# EAGLE board shieldV7 (EAGLE 8.7.1)
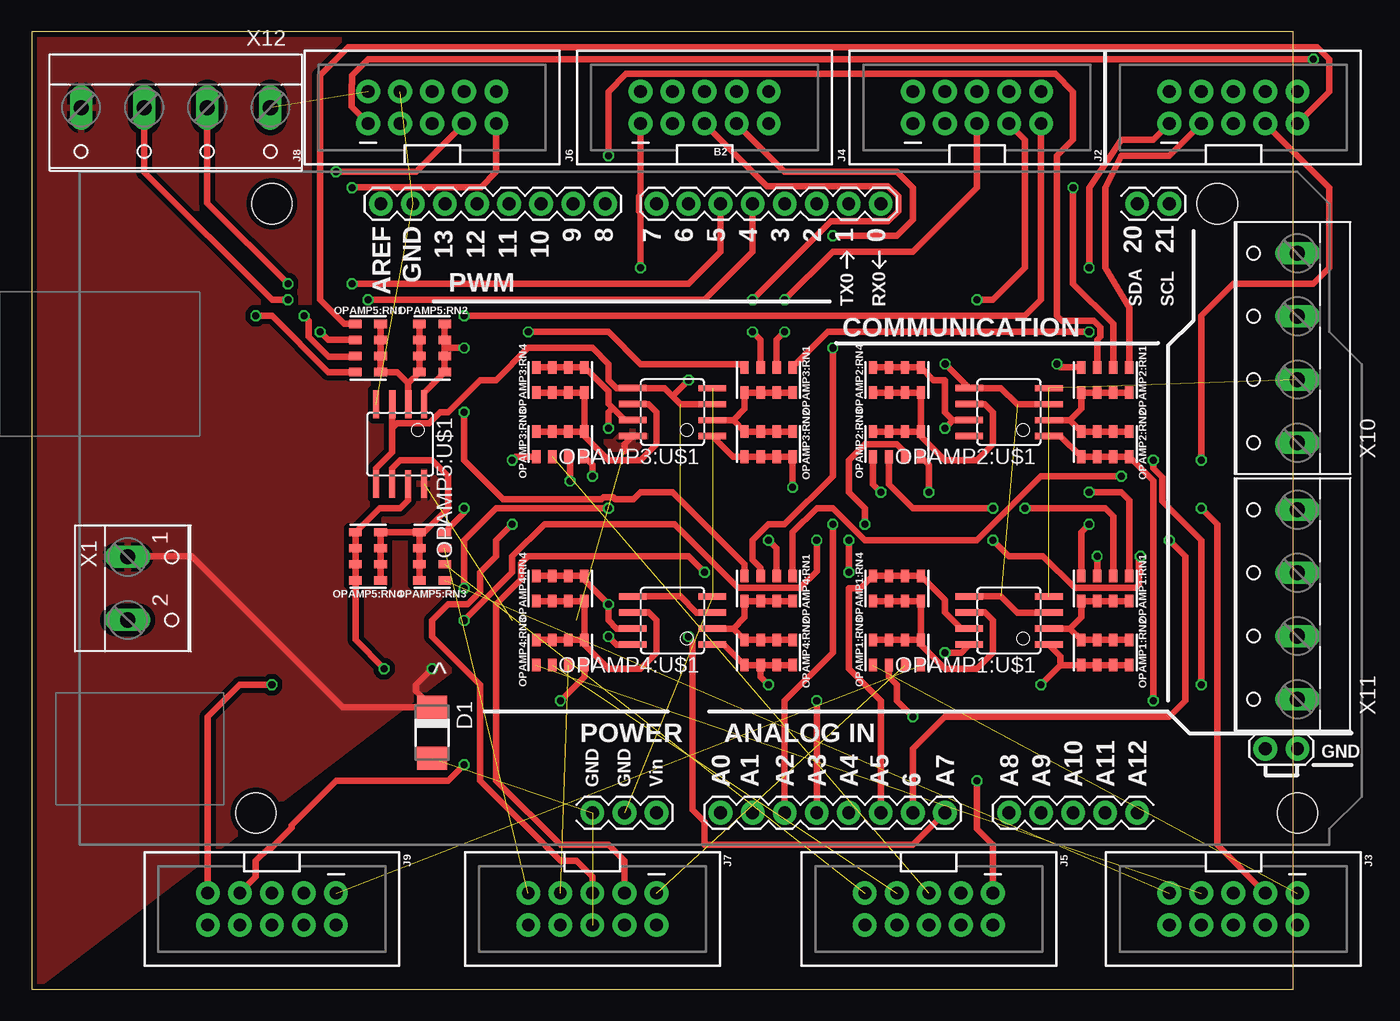
[diagram p0: board, top side]
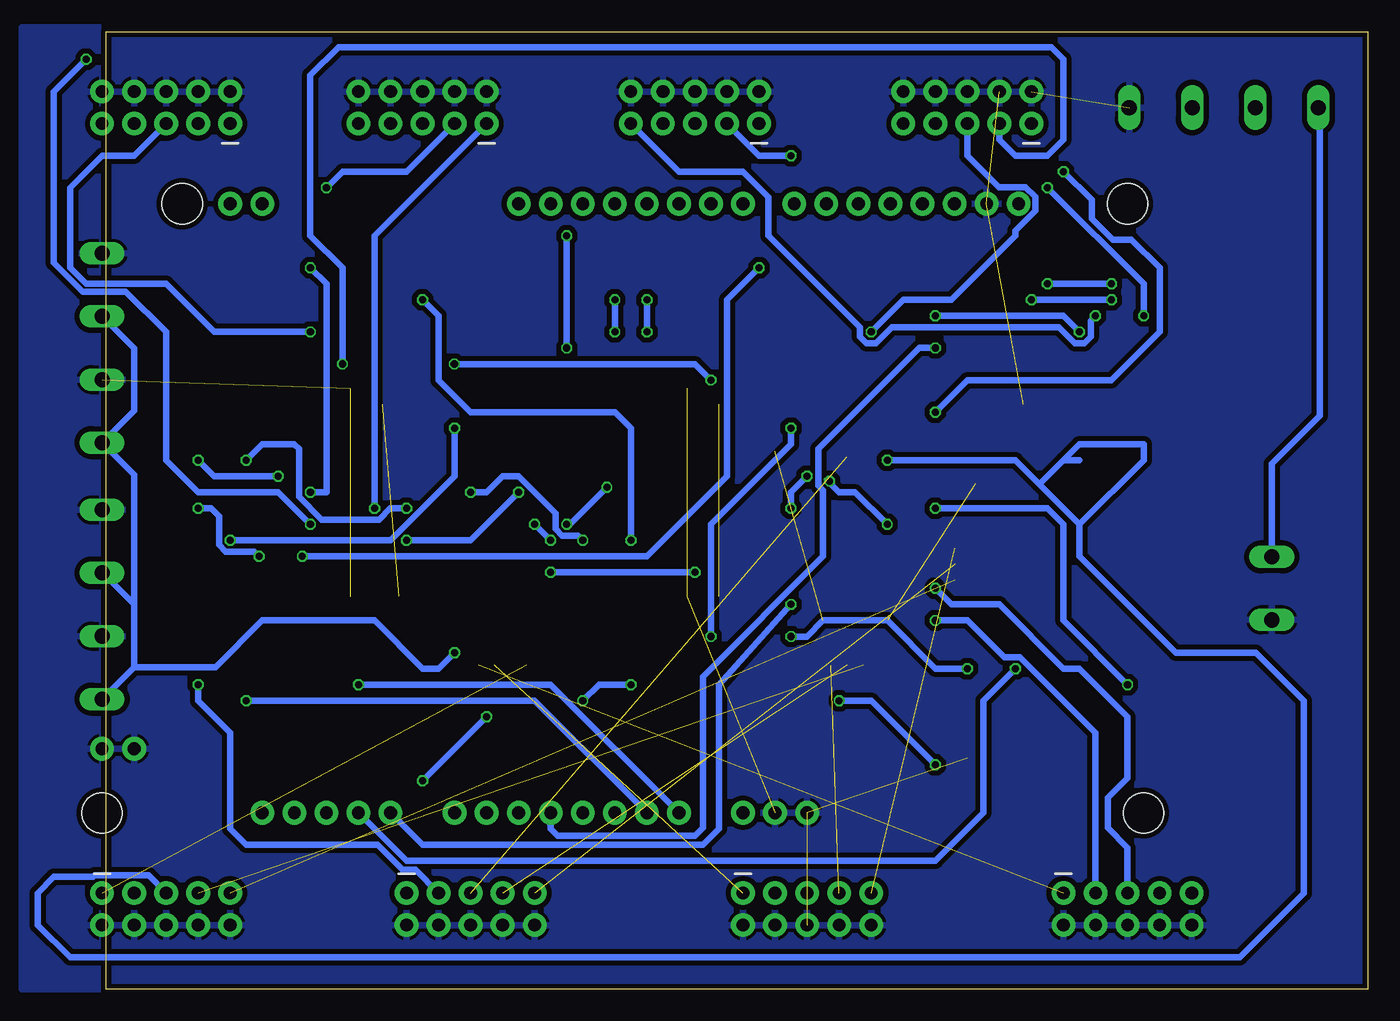
[diagram p1: board, bottom side, seen from below]

Size 100 x 75.87 mm. Coordinates in mm from the lower left corner, seen from the top.
Outline: 0,0 100,0 100,75.87 0,75.87 0,0
Copper layers (1*16): Top 0.035mm / dielectric 1.5mm / Bottom 0.035mm
Design rules "Dirty8TS": minimum track width 5mil, minimum drill 12mil, track to track 8mil, track to pad 8mil, pad to pad 8mil, via to via 8mil, smd to smd 0mil, copper to edge 10mil, drill to drill 10mil, minimum pad ring 10mil, minimum via ring 6mil, stop-mask expansion 2mil, vias tented up to drill 25mil, thermal gap 10mil
Net classes: 0 default: width 0.203 mm, drill 0.381 mm, clearance 0.203 mm

## Footprints (pad centres in the part's own frame; a part is rotated, then mirrored left to right if it is on the bottom)
ARDUINO_MEGA_EDIT = drill 1.016 pad 1.88: 0 13.97,24.13; 1 11.43,24.13; 2 8.89,24.13; 3 6.35,24.13; 4 3.81,24.13; 5 1.27,24.13; 6 -1.27,24.13; 7 -3.81,24.13; 8 -7.874,24.13; 9 -10.414,24.13; 10 -12.954,24.13; 11 -15.494,24.13; 12 -18.034,24.13; 13 -20.574,24.13; 20 34.29,24.13; 21 36.83,24.13; A0 1.27,-24.13; A1 3.81,-24.13; A2 6.35,-24.13; A3 8.89,-24.13; A4 11.43,-24.13; A5 13.97,-24.13; A6 16.51,-24.13; A7 19.05,-24.13; A8 24.13,-24.13; A9 26.67,-24.13; A10 29.21,-24.13; A11 31.75,-24.13; A12 34.29,-24.13; AREF -25.654,24.13; GND@0 -8.89,-24.13; GND@1 -6.35,-24.13; GND@2 44.45,-19.05; GND@3 46.99,-19.05; GND@4 -23.114,24.13; VIN -3.81,-24.13 | hole 3.2: -34.29,24.13; -35.56,-24.13; 40.64,24.13; 46.99,-24.13
DO-214AC = smd 1.8 x 2.4: A 2.025,0; C -2.025,0
2X5-SHROUDED = drill 1.016 pad 1.88: 1 -1.27,5.08; 2 1.27,5.08; 3 -1.27,2.54; 4 1.27,2.54; 5 -1.27,0; 6 1.27,0; 7 -1.27,-2.54; 8 1.27,-2.54; 9 -1.27,-5.08; 10 1.27,-5.08
0805-ARV_EDIT10K = smd 0.65 x 1: 1 -1.905,-1; 2 -0.635,-1; 3 0.635,-1; 4 1.905,-1; 5 1.905,1; 6 0.635,1; 7 -0.635,1; 8 -1.905,1
SOIC8 = smd 0.5 x 2.2: 1 -1.905,-3.154; 2 -0.645,-3.154; 3 0.625,-3.154; 4 1.895,-3.154; 5 1.905,3.154; 6 0.635,3.154; 7 -0.635,3.154; 8 -1.905,3.154
W237-102 = drill 1.194 long: 1 -2.5,-1.27; 2 2.5,-1.27
W237-4 = drill 1.194 long: 1 -7.5,-1.27; 2 -2.5,-1.27; 3 2.5,-1.27; 4 7.5,-1.27

## Placement (x,y rotation side)
B2  ARDUINO_MEGA_R3_EDIT  [ARDUINO_MEGA_EDIT]  53.34,38.1 0 top
D1  [DO-214AC]  31.75,20.32 270 top
J2  AVR_SPI_PROG_5X2_NEWPTH2  [2X5-SHROUDED]  95.25,69.85 90 top
J3  AVR_SPI_PROG_5X2_NEWPTH2  [2X5-SHROUDED]  95.25,6.35 270 top
J4  AVR_SPI_PROG_5X2_NEWPTH2  [2X5-SHROUDED]  74.93,69.85 90 top
J5  AVR_SPI_PROG_5X2_NEWPTH2  [2X5-SHROUDED]  71.12,6.35 270 top
J6  AVR_SPI_PROG_5X2_NEWPTH2  [2X5-SHROUDED]  53.34,69.85 90 top
J7  AVR_SPI_PROG_5X2_NEWPTH2  [2X5-SHROUDED]  44.45,6.35 270 top
J8  AVR_SPI_PROG_5X2_NEWPTH2  [2X5-SHROUDED]  31.75,69.85 90 top
J9  AVR_SPI_PROG_5X2_NEWPTH2  [2X5-SHROUDED]  19.05,6.35 270 top
OPAMP1:RN1  10k  [0805-ARV_EDIT10K]  85.09,31.75 180 top
OPAMP1:RN2  10k  [0805-ARV_EDIT10K]  85.09,26.67 180 top
OPAMP1:RN3  10k  [0805-ARV_EDIT10K]  68.58,26.67 0 top
OPAMP1:RN4  10k  [0805-ARV_EDIT10K]  68.58,31.75 0 top
OPAMP1:U$1  MCP6002SMT  [SOIC8]  77.47,29.21 90 top
OPAMP2:RN1  10k  [0805-ARV_EDIT10K]  85.09,48.26 180 top
OPAMP2:RN2  10k  [0805-ARV_EDIT10K]  85.09,43.18 180 top
OPAMP2:RN3  10k  [0805-ARV_EDIT10K]  68.58,43.18 0 top
OPAMP2:RN4  10k  [0805-ARV_EDIT10K]  68.58,48.26 0 top
OPAMP2:U$1  MCP6002SMT  [SOIC8]  77.47,45.72 90 top
OPAMP3:RN1  10k  [0805-ARV_EDIT10K]  58.42,48.26 180 top
OPAMP3:RN2  10k  [0805-ARV_EDIT10K]  58.42,43.18 180 top
OPAMP3:RN3  10k  [0805-ARV_EDIT10K]  41.91,43.18 0 top
OPAMP3:RN4  10k  [0805-ARV_EDIT10K]  41.91,48.26 0 top
OPAMP3:U$1  MCP6002SMT  [SOIC8]  50.8,45.72 90 top
OPAMP4:RN1  10k  [0805-ARV_EDIT10K]  58.42,31.75 180 top
OPAMP4:RN2  10k  [0805-ARV_EDIT10K]  58.42,26.67 180 top
OPAMP4:RN3  10k  [0805-ARV_EDIT10K]  41.91,26.67 0 top
OPAMP4:RN4  10k  [0805-ARV_EDIT10K]  41.91,31.75 0 top
OPAMP4:U$1  MCP6002SMT  [SOIC8]  50.8,29.21 90 top
OPAMP5:RN1  10k  [0805-ARV_EDIT10K]  26.67,50.8 270 top
OPAMP5:RN2  10k  [0805-ARV_EDIT10K]  31.75,50.8 270 top
OPAMP5:RN3  10k  [0805-ARV_EDIT10K]  31.75,34.29 90 top
OPAMP5:RN4  10k  [0805-ARV_EDIT10K]  26.67,34.29 90 top
OPAMP5:U$1  MCP6002SMT  [SOIC8]  29.21,43.18 180 top
X1  [W237-102]  8.89,31.75 270 top
X10  [W237-4]  99.06,50.8 90 top
X11  [W237-4]  99.06,30.48 90 top
X12  [W237-4]  11.43,68.58 180 top

## Library data of the parts
B2 = SparkFun-Boards
D1 = diode
J2-J9 = SparkFun-Connectors; PROD_ID: CONN-08671; SF_ID: PRT-08506
OPAMP1:RN1-OPAMP1:RN4 OPAMP2:RN1-OPAMP2:RN4 OPAMP3:RN1-OPAMP3:RN4 OPAMP4:RN1-OPAMP4:RN4 OPAMP5:RN1-OPAMP5:RN4 = SparkFun-Resistors
OPAMP1:U$1 OPAMP2:U$1 OPAMP3:U$1 OPAMP4:U$1 OPAMP5:U$1 = adam - ics
X1 = con-wago-500; MPN: 237-102; OC_FARNELL: unknown; OC_NEWARK: 70K9898
X10-X12 = con-wago-500; OC_FARNELL: unknown; OC_NEWARK: unknown

## Nets
+5V: B2.VIN D1.C OPAMP1:U$1.8 OPAMP3:U$1.8 OPAMP4:U$1.8 OPAMP5:U$1.8 X1.1 X10.1 X10.3 X11.1 X11.3 X12.4
A1O: B2.A0 OPAMP1:RN2.5 OPAMP1:RN2.6 OPAMP1:RN2.7 OPAMP1:RN2.8 OPAMP1:U$1.1
A2O: B2.A1 OPAMP2:RN2.5 OPAMP2:RN2.6 OPAMP2:RN2.7 OPAMP2:RN2.8 OPAMP2:U$1.1
A3O: B2.A2 OPAMP3:RN2.5 OPAMP3:RN2.6 OPAMP3:RN2.7 OPAMP3:RN2.8 OPAMP3:U$1.1
A4O: B2.A3 OPAMP4:RN2.5 OPAMP4:RN2.6 OPAMP4:RN2.7 OPAMP4:RN2.8 OPAMP4:U$1.1
A5O: B2.A4 OPAMP5:RN2.5 OPAMP5:RN2.6 OPAMP5:RN2.7 OPAMP5:RN2.8 OPAMP5:U$1.1
A6O: B2.A5 OPAMP1:RN4.5 OPAMP1:RN4.6 OPAMP1:RN4.7 OPAMP1:RN4.8 OPAMP1:U$1.7
A7O: B2.A6 OPAMP2:RN4.5 OPAMP2:RN4.6 OPAMP2:RN4.7 OPAMP2:RN4.8 OPAMP2:U$1.7
A8O: B2.A7 OPAMP3:RN4.5 OPAMP3:RN4.6 OPAMP3:RN4.7 OPAMP3:RN4.8 OPAMP3:U$1.7
A9O: B2.A8 OPAMP4:RN4.5 OPAMP4:RN4.6 OPAMP4:RN4.7 OPAMP4:RN4.8 OPAMP4:U$1.7
A10O: B2.A9 OPAMP5:RN4.5 OPAMP5:RN4.6 OPAMP5:RN4.7 OPAMP5:RN4.8 OPAMP5:U$1.7
CI: B2.4 X12.3
DI: B2.5 X12.2
GND: B2.GND@0 B2.GND@1 B2.GND@2 B2.GND@3 B2.GND@4 D1.A J2.2 J2.4 J2.6 J2.8 J2.10 J3.2 J3.4 J3.6 J3.8 J3.10 J4.2 J4.4 J4.6 J4.8 J4.10 J5.2 J5.4 J5.6 J5.8 J5.10 J6.2 J6.4 J6.6 J6.8 J6.10 J7.2 J7.4 J7.6 J7.8 J7.10 J8.2 J8.4 J8.6 J8.8 J8.10 J9.2 J9.4 J9.6 J9.8 J9.10 OPAMP1:U$1.4 OPAMP2:U$1.4 OPAMP3:U$1.4 OPAMP4:U$1.4 OPAMP5:U$1.4 X1.2 X10.2 X10.4 X11.2 X11.4 X12.1
OPAMP1:N$1: OPAMP1:RN3.5 OPAMP1:RN3.6 OPAMP1:RN3.7 OPAMP1:RN3.8 OPAMP1:RN4.1 OPAMP1:RN4.2 OPAMP1:RN4.3 OPAMP1:RN4.4 OPAMP1:U$1.6
OPAMP1:N$2: OPAMP1:RN1.5 OPAMP1:RN1.6 OPAMP1:RN1.7 OPAMP1:RN1.8 OPAMP1:RN2.1 OPAMP1:RN2.2 OPAMP1:RN2.3 OPAMP1:RN2.4 OPAMP1:U$1.2
OPAMP2:N$1: OPAMP2:RN3.5 OPAMP2:RN3.6 OPAMP2:RN3.7 OPAMP2:RN3.8 OPAMP2:RN4.1 OPAMP2:RN4.2 OPAMP2:RN4.3 OPAMP2:RN4.4 OPAMP2:U$1.6
OPAMP2:N$2: OPAMP2:RN1.5 OPAMP2:RN1.6 OPAMP2:RN1.7 OPAMP2:RN1.8 OPAMP2:RN2.1 OPAMP2:RN2.2 OPAMP2:RN2.3 OPAMP2:RN2.4 OPAMP2:U$1.2
OPAMP3:N$1: OPAMP3:RN3.5 OPAMP3:RN3.6 OPAMP3:RN3.7 OPAMP3:RN3.8 OPAMP3:RN4.1 OPAMP3:RN4.2 OPAMP3:RN4.3 OPAMP3:RN4.4 OPAMP3:U$1.6
OPAMP3:N$2: OPAMP3:RN1.5 OPAMP3:RN1.6 OPAMP3:RN1.7 OPAMP3:RN1.8 OPAMP3:RN2.1 OPAMP3:RN2.2 OPAMP3:RN2.3 OPAMP3:RN2.4 OPAMP3:U$1.2
OPAMP4:N$1: OPAMP4:RN3.5 OPAMP4:RN3.6 OPAMP4:RN3.7 OPAMP4:RN3.8 OPAMP4:RN4.1 OPAMP4:RN4.2 OPAMP4:RN4.3 OPAMP4:RN4.4 OPAMP4:U$1.6
OPAMP4:N$2: OPAMP4:RN1.5 OPAMP4:RN1.6 OPAMP4:RN1.7 OPAMP4:RN1.8 OPAMP4:RN2.1 OPAMP4:RN2.2 OPAMP4:RN2.3 OPAMP4:RN2.4 OPAMP4:U$1.2
OPAMP5:N$1: OPAMP5:RN3.5 OPAMP5:RN3.6 OPAMP5:RN3.7 OPAMP5:RN3.8 OPAMP5:RN4.1 OPAMP5:RN4.2 OPAMP5:RN4.3 OPAMP5:RN4.4 OPAMP5:U$1.6
OPAMP5:N$2: OPAMP5:RN1.5 OPAMP5:RN1.6 OPAMP5:RN1.7 OPAMP5:RN1.8 OPAMP5:RN2.1 OPAMP5:RN2.2 OPAMP5:RN2.3 OPAMP5:RN2.4 OPAMP5:U$1.2
S1A: J2.1 OPAMP1:RN1.1
S1B: J3.1 OPAMP1:RN3.1
S2A: J2.3 OPAMP2:RN1.1
S2B: J3.3 OPAMP2:RN3.1
S3A: J2.5 OPAMP3:RN1.1
S3B: J3.5 OPAMP3:RN3.1
S4A: J2.7 OPAMP4:RN1.1
S4B: J3.7 OPAMP4:RN3.1
S5A: J2.9 OPAMP5:RN1.1
S5B: J3.9 OPAMP5:RN3.1
S6A: J4.1 OPAMP1:RN1.2
S6B: J5.1 OPAMP1:RN3.2
S7A: J4.3 OPAMP2:RN1.2
S7B: J5.3 OPAMP2:RN3.2
S8A: J4.5 OPAMP3:RN1.2
S8B: J5.5 OPAMP3:RN3.2
S9A: J4.7 OPAMP4:RN1.2
S9B: J5.7 OPAMP4:RN3.2
S10A: J4.9 OPAMP5:RN1.2
S10B: J5.9 OPAMP5:RN3.2
S11A: J6.1 OPAMP1:RN1.3
S11B: J7.1 OPAMP1:RN3.3
S12A: J6.3 OPAMP2:RN1.3
S12B: J7.3 OPAMP2:RN3.3
S13A: J6.5 OPAMP3:RN1.3
S13B: J7.5 OPAMP3:RN3.3
S14A: J6.7 OPAMP4:RN1.3
S14B: J7.7 OPAMP4:RN3.3
S15A: J6.9 OPAMP5:RN1.3
S15B: J7.9 OPAMP5:RN3.3
S16A: J8.1 OPAMP1:RN1.4
S16B: J9.1 OPAMP1:RN3.4
S17A: J8.3 OPAMP2:RN1.4
S17B: J9.3 OPAMP2:RN3.4
S18A: J8.5 OPAMP3:RN1.4
S18B: J9.5 OPAMP3:RN3.4
S19A: J8.7 OPAMP4:RN1.4
S19B: J9.7 OPAMP4:RN3.4
S20A: J8.9 OPAMP5:RN1.4
S20B: J9.9 OPAMP5:RN3.4
VCC: OPAMP2:U$1.8
VREF: OPAMP1:U$1.3 OPAMP1:U$1.5 OPAMP2:U$1.3 OPAMP2:U$1.5 OPAMP3:U$1.3 OPAMP3:U$1.5 OPAMP4:U$1.3 OPAMP4:U$1.5 OPAMP5:U$1.3 OPAMP5:U$1.5

## Tracks (layer width: path | path; a pad name or v marks a point on that pad's centre or on a via)
+5V  (via drill 0.56)  (2 unrouted)
  Top 0.508: v72.39,26.67 73.68,26.67 OPAMP1:U$1.8 | OPAMP4:U$1.8 46.35,27.3 v45.72,27.94 | v31.75,25.4 30.48,24.13 30.48,23.61 D1.C 24.64,22.34 12.7,34.29 7.66,34.29 X1.1 | OPAMP3:U$1.8 46.99,43.16 46.99,42.62
  Bottom 0.508: X10.3 97.79,50.76 97.79,45.84 X10.1 97.79,40.76 97.79,30.48 | X11.1 97.79,25.52 | 97.79,25.52 97.79,30.48 | 97.79,30.48 100.29,32.98 X11.3 | X12.4 3.81,69.73 3.81,45.45 7.62,41.64 X1.1 | 97.79,25.52 91.32,25.52 87.63,29.21 78.74,29.21 74.93,25.4 73.66,25.4 v72.39,26.67 | v45.72,27.94 44.45,27.94 43.18,29.21 38.1,29.21 34.29,25.4 v31.75,25.4
  pour Top (isolate 0.406): 0,76.2 100,76.2 0,0 0,0
A1O  (via drill 0.56)
  Top 0.508: v80.01,24.13 81.55,25.67 | 81.55,25.67 OPAMP1:RN2.5 OPAMP1:RN2.6 OPAMP1:RN2.7 OPAMP1:RN2.8 | OPAMP1:U$1.1 81.55,26.38 81.55,25.67
  Bottom 0.508: B2.A0 64.77,24.13 v80.01,24.13
A2O  (via drill 0.56)
  Top 0.508: OPAMP2:U$1.1 81.55,43.81 OPAMP2:RN2.5 OPAMP2:RN2.6 OPAMP2:RN2.7 OPAMP2:RN2.8 88.9,40.27 v88.9,22.86
  Bottom 0.508: B2.A1 66.04,22.86 v88.9,22.86
A3O  (via drill 0.56)
  Top 0.508: OPAMP3:U$1.1 55.59,42.18 OPAMP3:RN2.5 OPAMP3:RN2.6 OPAMP3:RN2.7 OPAMP3:RN2.8 v60.33,39.75 | v63.5,36.83 63.5,26.67 59.69,22.86 B2.A2
  Bottom 0.508: v60.33,39.75 63.25,36.83 v63.5,36.83
A4O  (via drill 0.56)
  Top 0.508: OPAMP4:RN2.6 OPAMP4:RN2.5 54.88,27.3 OPAMP4:U$1.1 | OPAMP4:RN2.6 OPAMP4:RN2.7 OPAMP4:RN2.8 | B2.A3 v62.23,22.86 | v58.42,24.13 57.78,24.77 OPAMP4:RN2.6
  Bottom 0.508: v62.23,22.86 60.96,24.13 v58.42,24.13
A5O  (via drill 0.56)
  Top 0.508: 32.75,50.8 OPAMP5:RN2.6 OPAMP5:RN2.5 31.11,47.26 OPAMP5:U$1.1 | 32.75,50.8 OPAMP5:RN2.7 OPAMP5:RN2.8 | 32.75,50.8 v34.29,50.8
  Bottom 0.508: B2.A4 64.77,12.7 64.21,12.14 53.34,12.14 52.7,12.78 52.7,24.77 43.18,34.29 43.18,39.51 43.56,39.89 43.56,42.8 35.56,50.8 v34.29,50.8
A6O
  Top 0.508: OPAMP1:U$1.7 73.7,28.57 72.39,29.88 72.39,30.84 OPAMP1:RN4.5 OPAMP1:RN4.6 OPAMP1:RN4.7 OPAMP1:RN4.8 65.67,31.75 64.77,31.75 64.77,25.4 67.31,22.86 B2.A5
A7O  (via drill 0.56)
  Top 0.508: OPAMP2:RN4.8 OPAMP2:RN4.7 OPAMP2:RN4.6 OPAMP2:RN4.5 71.48,48.26 72.39,48.26 72.39,45.72 73.03,45.09 | OPAMP2:U$1.7 73.03,45.09 | B2.A6 69.85,19.05 72.39,21.59 90.17,21.59 91.44,22.86 91.44,34.29 v90.17,35.56 | v72.39,44.45 73.03,45.09
  Bottom 0.508: v90.17,35.56 77.47,35.56 72.39,40.64 v72.39,44.45
A8O  (via drill 0.56)
  Top 0.508: OPAMP3:RN4.8 OPAMP3:RN4.7 OPAMP3:RN4.6 OPAMP3:RN4.5 45.72,47.35 45.72,46.39 46.06,46.06 | 46.06,46.06 47.03,45.09 OPAMP3:U$1.7 | B2.A7 69.85,11.43 53.34,11.43 53.34,13.26 52.4,14.21 52.4,27.61 v52.07,27.94 | v45.72,44.45 45.72,45.72 46.06,46.06
  Bottom 0.508: v52.07,27.94 52.07,36.83 45.72,43.18 v45.72,44.45
A9O  (via drill 0.56)
  Top 0.508: OPAMP4:U$1.7 46.35,28.57 45.72,29.21 v45.72,30.48 43.81,32.38 OPAMP4:RN4.5 OPAMP4:RN4.6 OPAMP4:RN4.7 OPAMP4:RN4.8
  Bottom 0.508: B2.A8 74.93,11.43 52.7,11.43 51.44,12.7 51.44,24.13 v45.72,30.48
A10O  (via drill 0.56)
  Top 0.508: v27.94,25.4 25.67,27.67 OPAMP5:RN4.8 OPAMP5:RN4.7 OPAMP5:RN4.6 OPAMP5:RN4.5 27.57,38.1 29.21,38.1 29.84,38.73 OPAMP5:U$1.7
  Bottom 0.508: B2.A9 76.2,10.16 34.29,10.16 30.48,13.97 30.48,22.86 v27.94,25.4
CI  (via drill 0.56)
  Top 0.508: X12.3 8.93,64.73 19.05,54.61 v20.32,54.61 | v26.67,54.61 53.34,54.61 57.15,58.42 B2.4
  Bottom 0.508: v20.32,54.61 v26.67,54.61
DI  (via drill 0.56)
  Top 0.508: X12.2 13.93,62.27 v20.32,55.88 | v25.4,55.88 52.07,55.88 54.61,58.42 B2.5
  Bottom 0.508: v20.32,55.88 v25.4,55.88
GND  (9 unrouted)
  pour Bottom (isolate 0.406): 0,76.2 106.68,76.2 106.68,0 0,0
OPAMP1:N$1
  Top 0.508: OPAMP1:RN3.8 OPAMP1:RN3.7 OPAMP1:RN3.6 OPAMP1:RN3.5 | OPAMP1:RN4.1 OPAMP1:RN4.2 OPAMP1:RN4.3 OPAMP1:RN4.4 OPAMP1:RN3.5 | OPAMP1:U$1.6 75.56,29.84 76.2,29.21 76.2,26.67 74.93,25.4 72.39,25.4 70.48,27.3 OPAMP1:RN3.5
OPAMP1:N$2
  Top 0.508: OPAMP1:RN1.8 OPAMP1:RN1.7 OPAMP1:RN1.6 OPAMP1:RN1.5 83.19,29.46 82.29,28.57 | OPAMP1:RN2.1 OPAMP1:RN2.2 OPAMP1:RN2.3 OPAMP1:RN2.4 82.29,28.57 | OPAMP1:U$1.2 82.29,28.57
OPAMP2:N$1
  Top 0.508: OPAMP2:RN3.8 OPAMP2:RN3.7 OPAMP2:RN3.6 OPAMP2:RN3.5 | OPAMP2:RN4.1 OPAMP2:RN4.2 OPAMP2:RN4.3 OPAMP2:RN4.4 OPAMP2:RN3.5 | OPAMP2:U$1.6 75.56,46.35 76.2,45.72 76.2,43.18 74.93,41.91 72.39,41.91 70.48,43.81 OPAMP2:RN3.5
OPAMP2:N$2
  Top 0.508: OPAMP2:RN1.8 OPAMP2:RN1.7 OPAMP2:RN1.6 OPAMP2:RN1.5 83.19,45.97 82.29,45.08 | OPAMP2:RN2.1 OPAMP2:RN2.2 OPAMP2:RN2.3 OPAMP2:RN2.4 82.29,45.08 | OPAMP2:U$1.2 82.29,45.08
OPAMP3:N$1
  Top 0.508: OPAMP3:RN3.8 OPAMP3:RN3.7 OPAMP3:RN3.6 OPAMP3:RN3.5 | OPAMP3:RN4.1 OPAMP3:RN4.2 OPAMP3:RN4.3 OPAMP3:RN4.4 OPAMP3:RN3.5 | OPAMP3:U$1.6 48.9,46.35 49.53,45.72 49.53,43.18 48.26,41.91 45.72,41.91 43.81,43.81 OPAMP3:RN3.5
OPAMP3:N$2
  Top 0.508: OPAMP3:RN1.8 OPAMP3:RN1.7 OPAMP3:RN1.6 OPAMP3:RN1.5 56.52,45.97 55.62,45.08 | OPAMP3:RN2.1 OPAMP3:RN2.2 OPAMP3:RN2.3 OPAMP3:RN2.4 55.62,45.08 | OPAMP3:U$1.2 55.62,45.08
OPAMP4:N$1
  Top 0.508: OPAMP4:RN3.8 OPAMP4:RN3.7 OPAMP4:RN3.6 OPAMP4:RN3.5 | OPAMP4:RN4.1 OPAMP4:RN4.2 OPAMP4:RN4.3 OPAMP4:RN4.4 OPAMP4:RN3.5 | OPAMP4:U$1.6 48.9,29.84 49.53,29.21 49.53,26.67 48.26,25.4 45.72,25.4 43.81,27.3 OPAMP4:RN3.5
OPAMP4:N$2
  Top 0.508: OPAMP4:RN1.8 OPAMP4:RN1.7 OPAMP4:RN1.6 OPAMP4:RN1.5 56.52,29.46 55.62,28.57 | OPAMP4:RN2.1 OPAMP4:RN2.2 OPAMP4:RN2.3 OPAMP4:RN2.4 55.62,28.57 | OPAMP4:U$1.2 55.62,28.57
OPAMP5:N$1
  Top 0.508: OPAMP5:RN3.8 OPAMP5:RN3.7 OPAMP5:RN3.6 OPAMP5:RN3.5 | OPAMP5:RN4.1 OPAMP5:RN4.2 OPAMP5:RN4.3 OPAMP5:RN4.4 OPAMP5:RN3.5 | OPAMP5:U$1.6 28.57,41.27 29.21,41.91 31.75,41.91 33.02,40.64 33.02,38.1 31.11,36.2 OPAMP5:RN3.5
OPAMP5:N$2
  Top 0.508: OPAMP5:RN1.8 OPAMP5:RN1.7 OPAMP5:RN1.6 OPAMP5:RN1.5 28.96,48.9 29.86,48 | OPAMP5:RN2.1 OPAMP5:RN2.2 OPAMP5:RN2.3 OPAMP5:RN2.4 29.86,48 | OPAMP5:U$1.2 29.86,48
S1A  (via drill 0.56)
  Top 0.508: J2.1 88.9,67.31 86.36,67.31 83.82,63.5 v83.82,57.15 | OPAMP1:RN1.1 87,38.73 86.36,39.37 v83.82,39.37
  Bottom 0.508: v83.82,57.15 82.55,55.88 82.55,39.37 v83.82,39.37
S1B  (1 unrouted)
S2A
  Top 0.508: OPAMP2:RN1.1 87,53.98 85.09,57.15 85.09,63.5 86.36,66.04 90.17,66.04 J2.3
S2B  (via drill 0.56)
  Top 0.508: J3.3 93.98,11.43 93.98,36.83 v92.71,38.1 | v76.2,35.56 77.47,34.29 80.17,34.29 82.67,31.79 87.51,31.79 87.78,32.06 87.78,34.18 v87.88,34.29 | v67.31,39.37 66.67,40.01 OPAMP2:RN3.1
  Bottom 0.508: v92.71,38.1 91.69,38.1 91.06,37.47 91.06,35.19 90.54,34.67 88.27,34.67 v87.88,34.29 | v76.2,35.56 71.12,35.56 v67.31,39.37
S3A  (via drill 0.56)
  Top 0.508: OPAMP3:RN1.1 63.13,52.07 v83.82,52.07
  Bottom 0.508: J2.5 97.79,66.04 100.33,66.04 102.87,63.5 102.87,57.15 101.6,55.88 95.25,55.88 91.44,52.07 v83.82,52.07
S3B  (via drill 0.56)
  Top 0.508: OPAMP3:RN3.1 38.37,42.18 v38.1,41.91
  Bottom 0.508: J3.5 96.65,9.02 100.91,9.02 101.04,8.89 104.14,8.89 105.41,7.62 105.41,5.08 102.87,2.54 10.16,2.54 5.08,7.62 5.08,22.86 8.89,26.67 15.24,26.67 22.86,34.29 22.86,36.83 | 22.86,36.83 17.78,41.91 17.78,43.18 22.86,43.18 24.13,41.91 | 24.13,41.91 22.86,41.91 | v38.1,41.91 27.94,41.91 26.04,40.01 | 26.04,40.01 22.86,36.83 | 24.13,41.91 26.04,40.01
S4A  (via drill 0.56)
  Top 0.508: J2.7 102.87,63.5 102.87,57.15 101.6,55.88 95.25,55.88 92.71,53.34 v92.71,41.91 | OPAMP4:RN1.1 60.33,36.2 62.23,38.1 63.5,38.1 66.04,35.56 74.93,35.56 80.01,40.64 v86.36,40.64
  Bottom 0.508: v92.71,41.91 91.44,40.64 v86.36,40.64
S4B  (1 unrouted)
S5A
  Top 0.508: J2.9 102.87,71.12 102.87,73.66 101.91,74.62 25.09,74.62 22.86,72.39 22.86,54.61 24.77,52.7 OPAMP5:RN1.1
S5B  (1 unrouted)
S6A  (via drill 0.56)
  Top 0.508: OPAMP1:RN1.2 85.72,37.47 85.09,38.1 v78.74,38.1
  Bottom 0.508: v78.74,38.1 78.74,59.69 J4.1
S6B  (via drill 0.56)
  Top 0.508: J5.1 76.2,11.43 74.93,12.7 v74.93,16.51 | OPAMP1:RN3.2 67.94,24.77 68.58,24.13 68.58,22.86 v69.85,21.59
  Bottom 0.508: v74.93,16.51 v69.85,21.59
S7A  (via drill 0.56)
  Top 0.508: OPAMP2:RN1.2 85.72,52.7 82.55,55.88 v82.55,63.5
  Bottom 0.508: v82.55,63.5 81.28,64.77 76.2,64.77 J4.3
S7B  (via drill 0.56)
  Top 0.508: v92.71,24.13 92.71,35.56 89.61,38.66 89.61,40.57 88.9,41.28 v88.9,41.91 | v76.2,38.1 69.85,38.1 67.94,40.01 OPAMP2:RN3.2
  Bottom 0.508: J5.3 75.49,9.45 76.5,9.45 78.48,11.43 88.9,11.43 90.17,12.7 90.17,20.32 92.71,22.86 v92.71,24.13 | v76.2,38.1 77.48,38.1 78.37,37.21 82.92,37.21 84.71,39 84.71,42.8 85.09,43.18 87.63,43.18 v88.9,41.91
S8A  (via drill 0.56)
  Top 0.508: v59.69,54.61 63.5,58.42 69.85,58.42 74.93,63.5 J4.5 | v59.69,52.07 59.05,51.44 OPAMP3:RN1.2
  Bottom 0.508: v59.69,54.61 v59.69,52.07
S8B  (1 unrouted)
S9A  (via drill 0.56)
  Top 0.508: J4.7 78.74,67.31 78.74,57.15 76.2,54.61 v74.93,54.61 | v58.42,35.56 59.05,34.92 OPAMP4:RN1.2
  Bottom 0.508: v74.93,54.61 73.66,53.34 73.66,48.26 71.12,45.72 59.69,45.72 58.42,44.45 v58.42,35.56
S9B  (1 unrouted)
S10A  (via drill 0.56)
  Top 0.508: J4.9 80.01,54.61 78.74,53.34 v34.29,53.34 | OPAMP5:RN1.2 23.5,51.44 v22.86,52.07
  Bottom 0.508: v34.29,53.34 24.13,53.34 v22.86,52.07
S10B  (1 unrouted)
S11A  (via drill 0.56)
  Top 0.508: J6.1 48.26,62.94 48.13,62.81 48.13,61.65 48.26,61.52 v48.26,57.15 | v84.45,34.29 OPAMP1:RN1.3
  Bottom 0.508: v48.26,57.15 50.8,54.61 50.8,40.64 57.15,34.29 v84.45,34.29
S11B  (1 unrouted)
S12A  (via drill 0.56)
  Top 0.508: OPAMP2:RN1.3 84.45,51.45 84.71,51.7 84.71,52.44 84.19,52.96 81.66,52.96 81.28,53.34 81.28,66.04 82.55,67.31 82.55,71.12 81.15,72.52 47.12,72.52 45.72,71.12 v45.72,66.04
  Bottom 0.508: v45.72,66.04 48.26,66.04 J6.3
S12B  (via drill 0.56)
  Top 0.508: J7.3 46.99,10.16 45.72,11.43 41.91,11.43 36.83,16.51 36.83,30.48 38.81,32.46 38.81,33.73 39.37,34.29 52.07,34.29 v53.34,33.02 | OPAMP2:RN3.3 69.22,42.55 68.58,43.18 66.04,43.18 64.77,41.91 64.77,39.37 66.04,38.1 v66.04,36.83 | v64.77,35.56 v64.77,33.02
  Bottom 0.508: v53.34,33.02 v64.77,33.02 | v66.04,36.83 v64.77,35.56
S13A  (via drill 0.56)
  Top 0.508: OPAMP3:RN1.3 57.78,51.44 v57.15,52.07 | v57.15,54.61 63.37,60.83 67.89,60.83 68.71,61.65 68.71,62.81 67.89,63.63 58.29,63.63 J6.5
  Bottom 0.508: v57.15,52.07 v57.15,54.61
S13B  (via drill 0.56)
  Top 0.508: J7.5 44.45,8.89 43.18,10.16 41.91,10.16 35.56,16.51 35.56,24.13 31.75,27.94 31.75,29.21 33.02,30.48 34.55,30.48 35.56,31.49 35.56,33.02 36.83,34.29 36.83,35.56 v38.1,36.83 | v42.67,40.26 42.67,42.05 OPAMP3:RN3.3
  Bottom 0.508: v38.1,36.83 40.64,39.37 41.91,39.37 42.55,40.01 42.55,40.13 v42.67,40.26
S14A  (via drill 0.56)
  Top 0.508: J6.7 59.69,64.77 68.58,64.77 69.85,63.5 69.85,60.96 68.58,59.69 v63.5,59.69 | OPAMP4:RN1.3 57.78,33.4 57.15,34.04 57.15,35.56 58.42,36.83 59.69,36.83 63.5,40.64 v63.5,50.8
  Bottom 0.508: v63.5,59.69 v63.5,50.8
S14B  (1 unrouted)
S15A  (via drill 0.56)
  Top 0.508: OPAMP5:RN1.3 25.28,50.16 25.23,50.11 23.56,50.11 21.97,51.7 21.97,52.96 v21.59,53.34
  Bottom 0.508: J6.9 54.61,64.77 49.53,64.77 47.5,62.74 47.5,59.69 40.26,52.45 40.26,51.7 39.74,51.18 39,51.18 37.73,52.45 24.5,52.45 23.23,51.18 22.49,51.18 21.97,51.7 21.97,52.96 v21.59,53.34
S15B  (1 unrouted)
S16A  (via drill 0.56)
  Top 0.508: J8.1 25.35,69.9 25.35,71.67 25.4,71.72 25.4,72.39 26.67,73.66 v101.6,73.66 | v83.82,36.83 83.19,36.2 OPAMP1:RN1.4
  Bottom 0.508: v101.6,73.66 104.14,71.12 104.14,57.56 101.85,55.27 98.45,55.27 95.25,52.07 95.25,41.91 92.71,39.37 86.36,39.37 v83.82,36.83
S16B  (1 unrouted)
S17A  (via drill 0.56)
  Top 0.508: v81.28,49.53 81.55,49.26 OPAMP2:RN1.4
  Bottom 0.508: J8.3 29.21,67.31 27.94,66.04 25.4,66.04 24.13,67.31 24.13,73.66 25.09,74.62 81.58,74.62 83.82,72.39 83.82,59.69 81.28,57.15 v81.28,49.53
S17B  (via drill 0.56)
  Top 0.508: v34.29,29.21 38.1,33.02 38.1,34.29 40.64,36.83 50.96,36.83 56,31.79 60.92,31.79 | 60.92,31.79 60.96,31.75 | 60.92,31.79 62.23,33.11 v62.23,35.56 | v71.12,39.37 71.12,41.55 OPAMP2:RN3.4
  Bottom 0.508: J9.3 21.59,20.31 27.57,26.29 28.83,26.29 31.75,29.21 v34.29,29.21 | v62.23,35.56 62.61,35.94 63.87,35.94 64.39,36.46 64.39,37.72 67.31,40.64 68.58,40.64 69.85,39.37 v71.12,39.37
S18A  (via drill 0.56)
  Top 0.508: OPAMP3:RN1.4 56.24,49.53 48.26,49.53 45.72,52.07 v39.37,52.07
  Bottom 0.508: J8.5 31.75,66.04 29.26,63.55 27.14,63.55 26.36,62.78 26.36,61.68 27.94,60.11 27.94,59.69 33.02,54.61 36.83,54.61 v39.37,52.07
S18B  (via drill 0.56)
  Top 0.508: v34.29,31.75 34.29,35.56 36.83,38.1 v45.72,38.1 | v44.45,40.64 44.45,41.55 OPAMP3:RN3.4
  Bottom 0.508: J9.5 19.05,11.22 20.62,12.79 20.62,15.15 19.05,16.72 19.05,21.59 22.86,25.4 24.13,25.4 29.21,30.48 33.02,30.48 v34.29,31.75 | v45.72,38.1 45.72,39.37 v44.45,40.64
S19A  (via drill 0.56)
  Top 0.508: J8.7 30.48,64.77 v24.13,64.77 | OPAMP4:RN1.4 56.52,33.66 50.8,39.37 48.26,39.37 47.7,38.81 46.27,38.81 46.09,38.99 45.35,38.99 45.17,38.81 37.39,38.81 34.29,41.91 v34.29,45.72
  Bottom 0.508: v24.13,64.77 21.89,62.53 21.89,61.05 20.23,59.38 18.75,59.38 16.51,57.15 16.51,52.07 20.32,48.26 31.75,48.26 v34.29,45.72
S19B  (via drill 0.56)
  Top 0.508: J9.7 17.78,8.89 17.78,10.16 18.75,11.12 18.96,11.12 20.62,12.79 20.62,13.01 24.13,16.51 33.02,16.51 v34.29,17.78 | v41.91,22.86 43.81,24.77 OPAMP4:RN3.4
  Bottom 0.508: v34.29,17.78 39.37,22.86 v41.91,22.86
S20A  (via drill 0.56)
  Top 0.508: J8.9 36.83,64.77 35.61,63.55 25.45,63.55 v25.4,63.5 | v17.78,53.34 19.05,53.34 23.5,48.9 OPAMP5:RN1.4
  Bottom 0.508: v25.4,63.5 17.78,55.88 v17.78,53.34
S20B  (via drill 0.56)
  Top 0.508: J9.9 13.97,21.59 16.51,24.13 v19.05,24.13 | v34.29,38.1 34.29,37.73 OPAMP5:RN3.4
  Bottom 0.508: v19.05,24.13 24.13,29.21 24.13,36.83 25.4,38.1 v34.29,38.1
VREF  (via drill 0.56)  (2 unrouted)
  Top 0.508: OPAMP3:U$1.3 51.45,46.34 50.8,46.99 | 50.8,46.99 50.16,47.62 OPAMP3:U$1.5 46.35,47.62 45.72,48.26 45.72,49.53 44.45,50.8 39.37,50.8 36.83,48.26 35.56,48.26 33.02,45.72 32.39,45.72 31.52,44.85 28.99,44.85 28.59,44.45 | OPAMP2:U$1.3 78.11,46.34 76.83,47.62 OPAMP2:U$1.5 v72.41,49.53 72.39,49.53 | v52.07,48.26 50.8,46.99 | OPAMP1:U$1.3 78.11,29.84 76.83,31.11 OPAMP1:U$1.5 | OPAMP4:U$1.5 51.44,31.11 52.72,29.84 OPAMP4:U$1.3 | OPAMP5:U$1.5 27.3,41.27 28.59,42.55 28.59,44.45 | 28.59,44.45 OPAMP5:U$1.3
  Bottom 0.508: v72.41,49.53 53.34,49.53 v52.07,48.26

## Text on the board
tPlace: ^